# Altium PCB PCB1.PcbDoc
Units mil, origin at the board's own origin, x right, y up, seen from the top; angles counter-clockwise.
Board outline 6000 x 4000 mil, 2 copper layers (Top Layer, Bottom Layer); 10 components, 15 nets, 80 pads, 0 vias.
Unrouted connection lines stored in the file: 31.
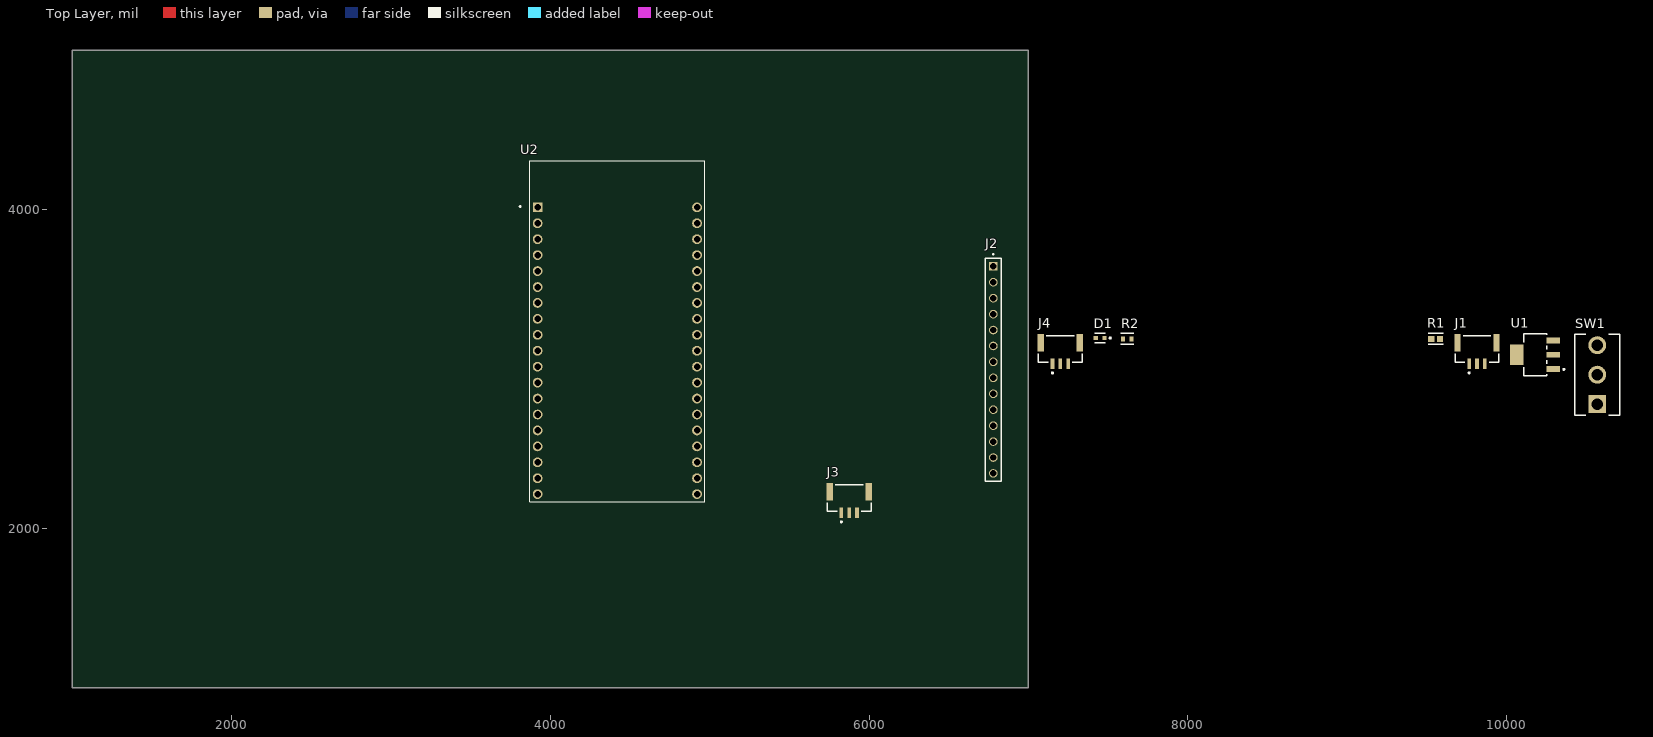
[diagram p0: Top Layer view]
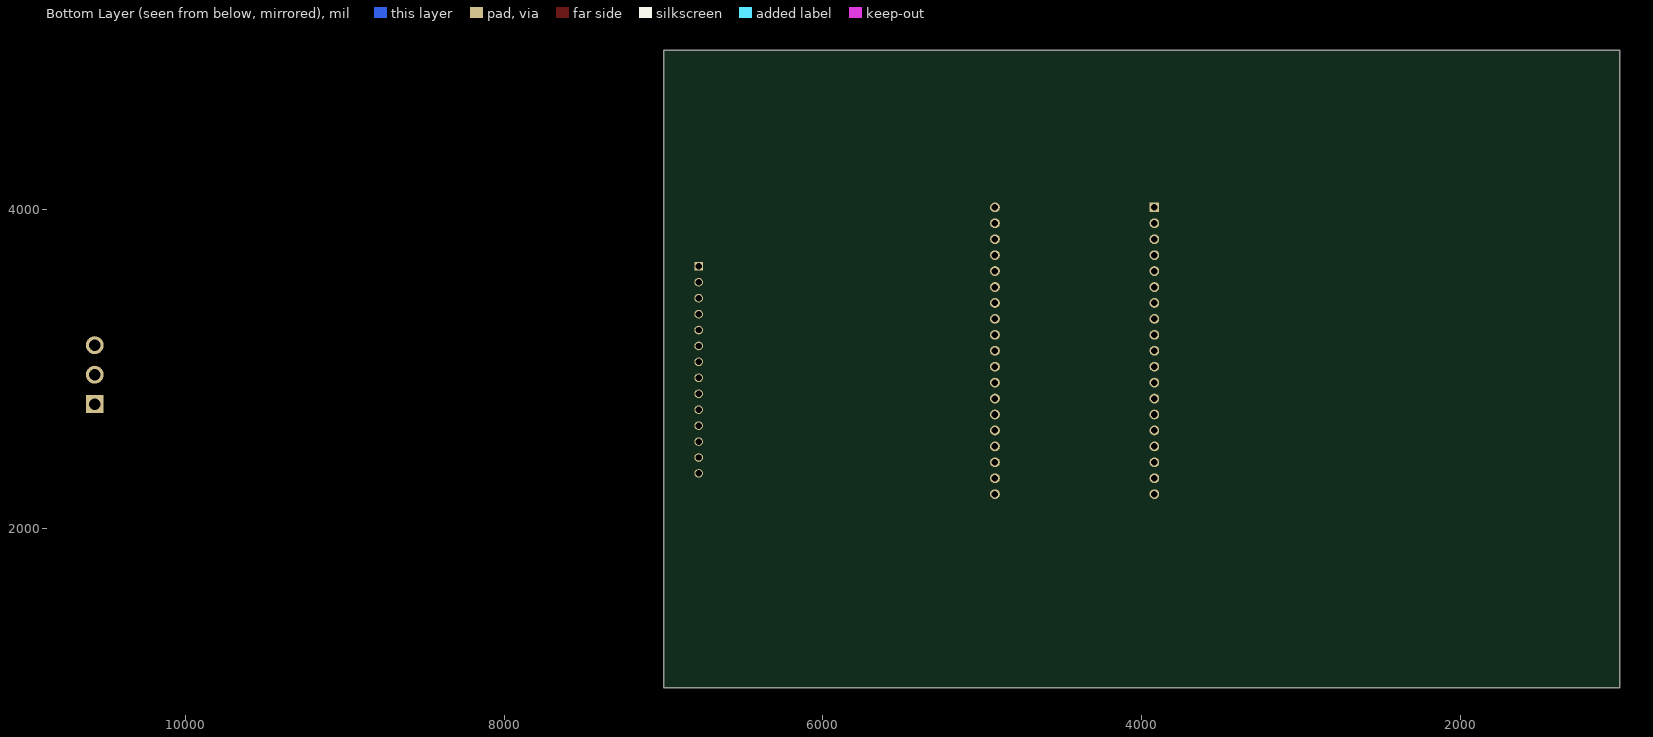
[diagram p1: Bottom Layer view, seen from below]

## Layer stack, top to bottom
Top Solder: solder mask 0.4, Solder Resist, Dk 3.5
Top Layer: signal copper 1.4
Dielectric 1: dielectric 12.6, FR-4, Dk 4.8
Bottom Layer: signal copper 1.4
Bottom Solder: solder mask 0.4, Solder Resist, Dk 3.5

## Board outline
1000,1000 7000,1000 7000,5000 1000,5000

## Design rules (kind name [scope] priority, off if disabled: settings)
Clearance [All] p1: gap=10 ignorepadtopadclearanceinfootprint=FALSE
PolygonConnect [All] p1: connectstyle=Relief reliefconductorwidth=10 reliefentries=4 polygonreliefangle="90 Angle" airgapwidth=10
RoutingVias [All] p1: holewidth=28 width=50 viastyle="Through Hole" minholewidth=28 minwidth=50 maxholewidth=28 maxwidth=50
SolderMaskExpansion [All] p1: expansion=4 istentingtop=FALSE
Width [All] p1: maxlimit=10 minlimit=10 preferedwidth=10
30 further rules are at their usual default settings.

## Components (designator, comment, footprint, x,y, rotation, side; value= is the part's Value field where it differs from the comment)
D1 "LSM0603453V" FP-LSM0603453V-MFG 7450,3195 r180 top
J1 "BM03B-GHS-TBT(LF)(SN)" FP-BM03B-GHS-TBT_LF_SN-MFG 9815,3125 r180 top
J2 "TSW-114-23-G-S-LL" SAMTEC_TSW-114-23-G-S-LL 6780,3645 r270 top
J3 "BM03B-GHS-TBT(LF)(SN)" FP-BM03B-GHS-TBT_LF_SN-MFG 5875,2190 r180 top
J4 "BM03B-GHS-TBT(LF)(SN)" FP-BM03B-GHS-TBT_LF_SN-MFG 7200,3125 r180 top
R1 "RMCF0603FT4K70" FP-RMCF0603-IPC_B 9555,3190 r180 top
R2 "RC0603FR-0710KL" FP-RC0603-0_55-IPC_C 7620,3190 r180 top
SW1 "A101SYCB04" FP-A101SYCB04-MFG 10570,2965 r180 top
U1 "LM3940IMP-3.3/NOPB" FP-DCY0004A-MFG 10180,3090 r180 top
U2 "ESP32-DEVKITC-32UE" ESPRESSIF_ESP32-DEVKITC-32UE 4420,3115 r0 top

## Footprints (in the part's own frame and the unit in brackets; to place one, negate y for a bottom-side part, rotate by r counter-clockwise, add the part's x,y. Pads: shape width x height; smd on the part's side, far side on the other; paste and mask are expansions set on the pad)
ESPRESSIF_ESP32-DEVKITC-32UE [mm]
  rect 1.56x1.56 hole 1.04: 1(-12.7,22.86)
  round 1.56 hole 1.04: 2(-12.7,20.32) 3(-12.7,17.78) 4(-12.7,15.24) 5(-12.7,12.7) 6(-12.7,10.16) 7(-12.7,7.62) 8(-12.7,5.08) 9(-12.7,2.54) 10(-12.7,0) 11(-12.7,-2.54) 12(-12.7,-5.08) 13(-12.7,-7.62) 14(-12.7,-10.16) 15(-12.7,-12.7) 16(-12.7,-15.24) 17(-12.7,-17.78) 18(-12.7,-20.32) 19(-12.7,-22.86) 20(12.7,22.86) 21(12.7,20.32) 22(12.7,17.78) 23(12.7,15.24) 24(12.7,12.7) 25(12.7,10.16) 26(12.7,7.62) 27(12.7,5.08) 28(12.7,2.54) 29(12.7,0) 30(12.7,-2.54) 31(12.7,-5.08) 32(12.7,-7.62) 33(12.7,-10.16) 34(12.7,-12.7) 35(12.7,-15.24) 36(12.7,-17.78) 37(12.7,-20.32) 38(12.7,-22.86)
  silkscreen extent -15.6,-24.1 13.95,30.3
FP-A101SYCB04-MFG [mil]
  rect 112.37x112.37 hole 73 paste-99999 mask+0: 1(0,185)
  round 112.37 hole 73 paste-99999 mask+0: 2(0,0) 3(0,-185)
  silkscreen extent -140,-255 140,255, body extent -144,-259 144,259, height 10
FP-BM03B-GHS-TBT_LF_SN-MFG [mm]
  rect 0.6x1.7 smd paste+0 mask+0: 1(1.25,2.325) 2(0,2.325) 3(-1.25,2.325)
  rect 1x2.8 smd paste+0 mask+0: 4(-3.1,-1.025) 5(3.1,-1.025)
  silkscreen extent -3.5,-2.12 3.5,3.9, body extent -3.7,-2.52 3.7,3.27, height 0.25
FP-DCY0004A-MFG [mm]
  rect 2.15x0.95 smd paste+0 mask+0: 1(-2.9,2.3) 2(-2.9,0) 3(-2.9,-2.3)
  rect 2.15x3.25 smd paste+0 mask+0: 4(2.9,0)
  silkscreen extent -4.7,-3.35 1.85,3.35, body extent -4.08,-3.45 4.08,3.45, height 0.25
FP-LSM0603453V-MFG [mm]
  rect 0.7x0.7 smd paste+0 mask+0: 1(-0.7,0) 2(0.7,0)
  silkscreen extent -1.73,-0.72 0.85,0.72, body extent -1.15,-0.55 1.15,0.55, height 0.25
FP-RC0603-0_55-IPC_C [mil]
  rect 25.93x31.97 smd paste+0 mask+0: 1(-26.64,0) 2(26.64,0)
  silkscreen extent -40,-33 40,33, body extent -44,-22 44,22, height 10
FP-RMCF0603-IPC_B [mil]
  rect 39.61x37.73 smd paste+0 mask+0: 1(-27.6,0) 2(27.6,0)
  silkscreen extent -47,-35 47,35, body extent -57,-29 57,29, height 10
SAMTEC_TSW-114-23-G-S-LL [mm]
  rect 1.37x1.37 hole 1.02: 01(0,0)
  round 1.37 hole 1.02: 02(2.54,0) 03(5.08,0) 04(7.62,0) 05(10.16,0) 06(12.7,0) 07(15.24,0) 08(17.78,0) 09(20.32,0) 10(22.86,0) 11(25.4,0) 12(27.94,0) 13(30.48,0) 14(33.02,0)
  silkscreen extent -2.02,-1.27 34.29,1.27

## Part data
D1: library part CMP-00731-94024739-1, "LSM0603453V LED SM 0603 3V -/1000/-mcd Green", Case/Package=0603, Color=Green, Forward Current=20mA, Forward Voltage=2.3V, Max Operating Temperature=85°C, Min Operating Temperature=-40°C, Power Dissipation=60mW, Reverse Voltage=5V, Height=550µm, Luminous Intensity=120mcd, NexarPartId=94024739, Schedule B="8541402000, 8541406050", Viewing Angle=120°, Wavelength=576nm
J1 J3 J4: library part CMP-17439-000130-2, "CONN HEADER SMD 3POS 1.25MM", Current Rating=1A, Housing Color=Natural, Max Operating Temperature=85°C, Min Operating Temperature=-25°C, Voltage Rating=50V, Contact Material="Copper, Tin", Contact Plating=Tin, Height=4.05mm, Housing Material=Nylon, Lead Free="Lead Free", Lead Pitch=1.25mm, Length=7mm, Mount="Surface Mount", Number of Contacts=3, Number of Positions=3, Number of Rows=1, Orientation=Straight, Packaging="Cut Tape", Pitch=1.25mm, REACH SVHC="No SVHC", RoHS=Compliant, Termination="Crimp, Solder", Voltage Rating (AC)=50V, Width=4.25mm
J2: Package=None, Availability=Unavailable, MP=TSW-114-23-G-S-LL, Price=None
R1: library part CMP-26527-005485-1, "4.7kΩ ±1% 0.1W 0603 Thick Film Chip Resistor AEC-Q200 compliant", Case Code (Imperial)=0603, Case Code (Metric)=1608, Max Operating Temperature=155°C, Max Power Dissipation=100mW, Min Operating Temperature=-55°C, Resistance=4.7kR, Resistor Type="Thick Film", Temperature Coefficient=100ppm/°C, Tolerance=1%, Case/Package=0603, Construction=Rectangular, Contact Plating=Tin, Depth=0.8mm, Features="Automotive AEC-Q200", Height=0.022inch, Lead Free="Lead Free", Length=1.55mm, Military Standard=Not, Mount="Surface Mount", Number of Terminations=2, Packaging="Tape and Reel", Power Rating=100mW, Radiation Hardening=No, RoHS Compliant=Yes, Series=RMCF, Width=0.031inch
R2: library part CMP-2100-03664-2, "RES 10K OHM 1% 1/10W 0603", Case Code (Imperial)=0603, Case Code (Metric)=1608, Max Operating Temperature=155°C, Max Power Dissipation=100mW, Min Operating Temperature=-55°C, Resistance=10kR, Resistance Tolerance=1%, Resistor Type="Thick Film", Temperature Coefficient=100ppm/°C, Voltage Rating=75V, Voltage Rating (DC)=50V, Case/Package=0603, Construction=Rectangular, Depth=0.8mm, Features="Moisture Resistant", Height=0.45mm, Lead Free="Lead Free", Lead Pitch=0.3mm, Length=1.6mm, Military Standard=Not, Number of Pins=2, Number of Terminations=2, Packaging="Tape and Reel", Power Rating=100mW, RoHS Compliant=Yes, Series=RC, Size Code=0603, Termination=SMD/SMT, Tolerance=1%, Weight=7.1E-05oz, Width=0.8mm
SW1: library part CMP-03408-000017-1, "SWITCH TOGGLE SPDT 0.4VA 20V", Actuator Color=Chrome, Contact Current Rating=400mA, Contact Resistance=10mR, Flammability Rating="UL94 V-1", Insulation Resistance=30MR, Max Operating Temperature=85°C, Max Voltage Rating (AC)=20V, Min Operating Temperature=-30°C, Package Quantity=100, Power Rating=400mW, Actuator Length=10.41mm, Actuator Material=Phenolic, Actuator Type="Standard Round", Contact Material=Copper, Contact Plating=Gold, Depth=6.86mm, Electrical Life=6000Cycles, ELV=Compliant, Illumination Type=Non-Illuminated, Lead Free="Lead Free", Max Voltage Rating (DC)=20V, Mount=Panel, Number of Poles=1, Number of Positions=2, Orientation=Straight, Packaging=Bulk, Radiation Hardening=No, REACH SVHC="No SVHC", RoHS Compliant=Yes, Series="Gemini A", Switch Function=On-On, Termination="PC Pins", Throw Configuration=SPDT, Voltage Rating (AC)=20V, Voltage Rating (DC)=20V
U1: library part CMP-0062-01788-4, "IC REG LINEAR 3.3V 1A SOT223-4", Case/Package=SOT-223, Current Rating=1A, Dropout Voltage=500mV, Max Input Voltage=7.5V, Max Operating Temperature=125°C, Max Output Voltage=3.3V, Min Input Voltage=4.5V, Min Operating Temperature=-40°C, Package Quantity=1000, Quiescent Current=15mA, Contact Plating=Tin, Height=1.6mm, Lead Free="Lead Free", Length=6.5mm, Max Output Current=1A, Max Supply Voltage=7.5V, Min Supply Voltage=4.5V, Mount="Surface Mount", Nominal Output Voltage=3.3V, Number of Outputs=1, Number of Pins=4, Number of Regulators=1, Output Configuration=Positive, Output Current=1A, Output Type=Fixed, Output Voltage=3.3V, Packaging="Tape and Reel", Polarity=Positive, Radiation Hardening=No, REACH SVHC="No SVHC", Series=-, Termination=SMD/SMT, Width=3.56mm
U2: "ESP32-WROOM-32UE series Transceiver; 802.11 b/g/n (Wi-Fi, WiFi, WLAN), BluetoothÂ® Smart Ready 4.x Dual Mode Evaluation Board", Package=None, Availability="In Stock", Check_prices=https://www.snapeda.com/parts/ESP32-DEVKITC-32UE/Espressif+Systems/view-part/?ref=eda, MF="Espressif Systems", MP=ESP32-DEVKITC-32UE, Price=None, Purchase-URL=https://pricing.snapeda.com/search/part/ESP32-DEVKITC-32UE/?ref=eda, SnapEDA_Link=https://www.snapeda.com/parts/ESP32-DEVKITC-32UE/Espressif+Systems/view-part/?ref=snap

## Nets (pads, with @x,y where several pads share a name; then routed paths per layer and width w, separated by ;. In a path a pad name is that pad's centre, name@x,y a point inside that pad or via, vN(x,y) a via of type N, cw(c..) or ccw(c..) an arc to the next point about the centre after c; other vN are vias at no path point)
+5: J1.1 J2.01 J3.1 J4.1 R1.1 R2.1 SW1.2
CS: J2.03 U2.29
DC/RS: J2.05 U2.9
GND: D1.1 J1.3 J2.02 J3.3 J4.3 SW1.1 U1.2 U1.4 U2.14 U2.20 U2.26
LED: J2.08 U2.11
NetD1_2: D1.2 U2.30
NetJ1_2: J1.2 R1.2 U2.15
NetJ3_2: J3.2 R2.2 U2.13
NetJ4_2: J4.2 U2.5
NetSW1_3: SW1.3 U1.1
NetU1_3: U1.3 U2.1
RESET: J2.04 U2.10
SCK: J2.07 U2.28
SDI(MOSI): J2.06 U2.21
SDO(MISO): J2.09 U2.27
pads on no net: J1.4 J1.5 J2.10 J2.11 J2.12 J2.13 J2.14 J3.4 J3.5 J4.4 J4.5 U2.2 U2.3 U2.4 U2.6 U2.7 U2.8 U2.12 U2.16 U2.17 U2.18 U2.19 U2.22 U2.23 U2.24 U2.25 U2.31 U2.32 U2.33 U2.34 U2.35 U2.36 U2.37 U2.38